# EAGLE board CTM_Status_Station_Design_v45 (EAGLE 9.7.0)
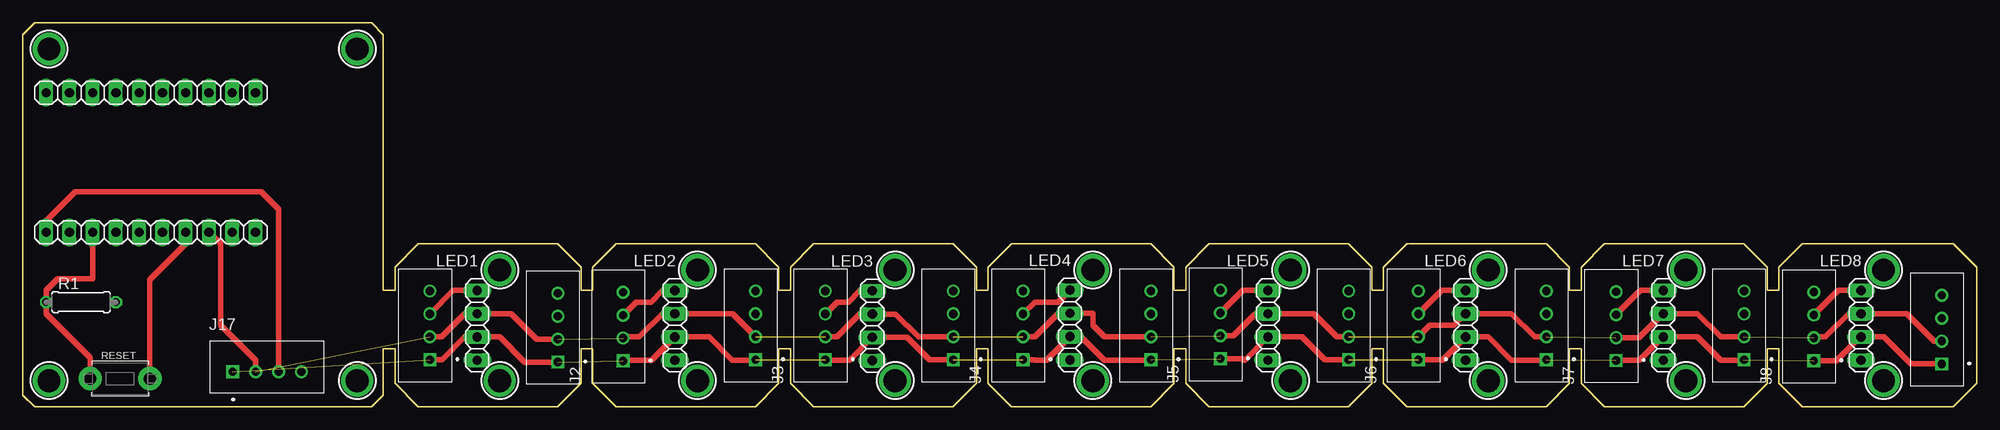
[diagram p0: board, top side]
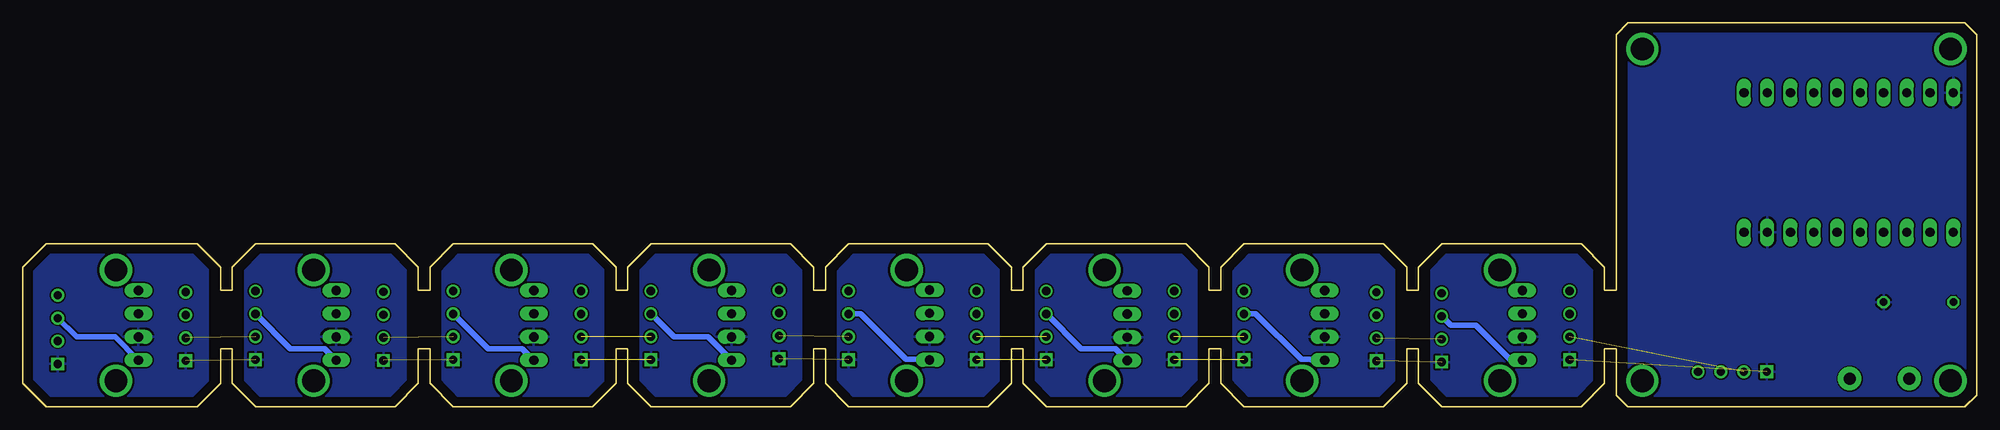
[diagram p1: board, bottom side, seen from below]

Size 213.36 x 41.91 mm. Coordinates in mm from the lower left corner, seen from the top.
Outline: 1.27,41.91 38.1,41.91 39.37,40.64 39.37,12.7 40.64,12.7 40.64,15.24 43.18,17.78 58.42,17.78 60.96,15.24 60.96,12.7 62.23,12.7 62.23,15.24 64.77,17.78 80.01,17.78 82.55,15.24 82.55,12.7 83.82,12.7 83.82,15.24 86.36,17.78 101.6,17.78 104.14,15.24 104.14,12.7 105.41,12.7 105.41,15.24 107.95,17.78 123.19,17.78 125.73,15.24 125.73,12.7 127,12.7 127,15.24 129.54,17.78 144.78,17.78 147.32,15.24 147.32,12.7 148.59,12.7 148.59,15.24 151.13,17.78 166.37,17.78 168.91,15.24 168.91,12.7 170.18,12.7 170.18,15.24 172.72,17.78 187.96,17.78 190.5,15.24 190.5,12.7 191.77,12.7 191.77,15.24 194.31,17.78 210.82,17.78 213.36,15.24 213.36,2.54 210.82,0 194.31,0 191.77,2.54 191.77,6.35 190.5,6.35 190.5,2.54 187.96,0 172.72,0 170.18,2.54 170.18,6.35 168.91,6.35 168.91,2.54 166.37,0 151.13,0 148.59,2.54 148.59,6.35 147.32,6.35 147.32,2.54 144.78,0 129.54,0 127,2.54 127,6.35 125.73,6.35 125.73,2.54 123.19,0 107.95,0 105.41,2.54 105.41,6.35 104.14,6.35 104.14,2.54 101.6,0 86.36,0 83.82,2.54 83.82,6.35 82.55,6.35 82.55,2.54 80.01,0 64.77,0 62.23,2.54 62.23,6.35 60.96,6.35 60.96,2.54 58.42,0 43.18,0 40.64,2.54 40.64,6.35 39.37,6.35 39.37,1.27 38.1,0 1.27,0 0,1.27 0,40.64 1.27,41.91
Copper layers (1*16): Top 0.035mm / dielectric 1.5mm / Bottom 0.035mm
Design rules "default": minimum track width 6mil, minimum drill 0.35mm, track to track 6mil, track to pad 6mil, pad to pad 6mil, via to via 6mil, smd to smd 6mil, copper to edge 40mil, drill to drill 6mil, minimum pad ring 10mil, minimum via ring 8mil, stop-mask expansion 4mil, vias tented up to drill 0mil, thermal gap 10mil

## Footprints (pad centres in the part's own frame; a part is rotated, then mirrored left to right if it is on the bottom)
B4B-XH-A(LF)(SN) = drill 0.9 square: 1 -3.75,0 | drill 0.9: 2 -1.25,0; 3 1.25,0; 4 3.75,0
1X04 = drill 1.016 long: 1 -3.81,0; 2 -1.27,0; 3 1.27,0; 4 3.81,0
0207/7 = drill 0.813 octagon: 1 -3.81,0; 2 3.81,0
TACT_PANA-EVQ = drill 1.3 pad 2.54: P$1 -3.25,0; P$2 3.25,0
1X10 = drill 1.016 long: 1 -11.43,0; 2 -8.89,0; 3 -6.35,0; 4 -3.81,0; 5 -1.27,0; 6 1.27,0; 7 3.81,0; 8 6.35,0; 9 8.89,0; 10 11.43,0
MOUNTINGHOLE_2.5_PLATED = drill 2.5 pad 3.2: P$1 0,0

## Placement (x,y rotation side)
J1  B4B-XH-A(LF)(SN)  [B4B-XH-A(LF)(SN)]  44.45,8.89 90 top
J2  B4B-XH-A(LF)(SN)  [B4B-XH-A(LF)(SN)]  65.56,8.75 90 top
J3  B4B-XH-A(LF)(SN)  [B4B-XH-A(LF)(SN)]  87.63,8.89 90 top
J4  B4B-XH-A(LF)(SN)  [B4B-XH-A(LF)(SN)]  109.22,8.89 90 top
J5  B4B-XH-A(LF)(SN)  [B4B-XH-A(LF)(SN)]  130.79,8.99 90 top
J6  B4B-XH-A(LF)(SN)  [B4B-XH-A(LF)(SN)]  152.4,8.89 90 top
J7  B4B-XH-A(LF)(SN)  [B4B-XH-A(LF)(SN)]  173.99,8.8 90 top
J8  B4B-XH-A(LF)(SN)  [B4B-XH-A(LF)(SN)]  195.58,8.77 90 top
J9  B4B-XH-A(LF)(SN)  [B4B-XH-A(LF)(SN)]  80.01,8.89 90 top
J10  B4B-XH-A(LF)(SN)  [B4B-XH-A(LF)(SN)]  58.42,8.63 90 top
J11  B4B-XH-A(LF)(SN)  [B4B-XH-A(LF)(SN)]  101.6,8.89 90 top
J12  B4B-XH-A(LF)(SN)  [B4B-XH-A(LF)(SN)]  123.19,8.89 90 top
J13  B4B-XH-A(LF)(SN)  [B4B-XH-A(LF)(SN)]  144.78,8.89 90 top
J14  B4B-XH-A(LF)(SN)  [B4B-XH-A(LF)(SN)]  166.37,8.89 90 top
J15  B4B-XH-A(LF)(SN)  [B4B-XH-A(LF)(SN)]  187.96,8.89 90 top
J16  B4B-XH-A(LF)(SN)  [B4B-XH-A(LF)(SN)]  209.55,8.42 90 top
J17  B4B-XH-A(LF)(SN)  [B4B-XH-A(LF)(SN)]  26.67,3.81 0 top
LED1  PINHD-1X4  [1X04]  49.61,8.89 270 top
LED2  PINHD-1X4  [1X04]  71.2,8.89 270 top
LED3  PINHD-1X4  [1X04]  92.75,8.85 270 top
LED4  PINHD-1X4  [1X04]  114.34,8.93 270 top
LED5  PINHD-1X4  [1X04]  135.97,8.89 270 top
LED6  PINHD-1X4  [1X04]  157.56,8.89 270 top
LED7  PINHD-1X4  [1X04]  179.15,8.89 270 top
LED8  PINHD-1X4  [1X04]  200.74,8.89 270 top
R1  10k  [0207/7]  6.35,11.43 0 top
RESET  [TACT_PANA-EVQ]  10.62,3.07 180 top
TP_LEFT_H  PINHD-1X10  [1X10]  13.97,19.05 0 top
TP_RIGHT_H  PINHD-1X10  [1X10]  13.97,34.29 0 top
U$1  MOUNTINGHOLE2.5  [MOUNTINGHOLE_2.5_PLATED]  2.85,39.06 0 top
U$2  MOUNTINGHOLE2.5  [MOUNTINGHOLE_2.5_PLATED]  52.07,14.93 0 top
U$3  MOUNTINGHOLE2.5  [MOUNTINGHOLE_2.5_PLATED]  52.07,2.85 0 top
U$4  MOUNTINGHOLE2.5  [MOUNTINGHOLE_2.5_PLATED]  73.66,14.93 0 top
U$5  MOUNTINGHOLE2.5  [MOUNTINGHOLE_2.5_PLATED]  73.66,2.85 0 top
U$6  MOUNTINGHOLE2.5  [MOUNTINGHOLE_2.5_PLATED]  95.25,14.93 0 top
U$7  MOUNTINGHOLE2.5  [MOUNTINGHOLE_2.5_PLATED]  36.52,39.06 0 top
U$8  MOUNTINGHOLE2.5  [MOUNTINGHOLE_2.5_PLATED]  36.52,2.85 0 top
U$9  MOUNTINGHOLE2.5  [MOUNTINGHOLE_2.5_PLATED]  95.25,2.85 0 top
U$10  MOUNTINGHOLE2.5  [MOUNTINGHOLE_2.5_PLATED]  116.84,14.93 0 top
U$11  MOUNTINGHOLE2.5  [MOUNTINGHOLE_2.5_PLATED]  116.84,2.85 0 top
U$12  MOUNTINGHOLE2.5  [MOUNTINGHOLE_2.5_PLATED]  138.43,14.93 0 top
U$13  MOUNTINGHOLE2.5  [MOUNTINGHOLE_2.5_PLATED]  138.43,2.85 0 top
U$14  MOUNTINGHOLE2.5  [MOUNTINGHOLE_2.5_PLATED]  160.02,14.93 0 top
U$15  MOUNTINGHOLE2.5  [MOUNTINGHOLE_2.5_PLATED]  181.61,14.93 0 top
U$16  MOUNTINGHOLE2.5  [MOUNTINGHOLE_2.5_PLATED]  181.61,2.85 0 top
U$17  MOUNTINGHOLE2.5  [MOUNTINGHOLE_2.5_PLATED]  203.2,14.93 0 top
U$18  MOUNTINGHOLE2.5  [MOUNTINGHOLE_2.5_PLATED]  203.2,2.85 0 top
U$19  MOUNTINGHOLE2.5  [MOUNTINGHOLE_2.5_PLATED]  160.02,2.85 0 top
U$28  MOUNTINGHOLE2.5  [MOUNTINGHOLE_2.5_PLATED]  2.85,2.85 0 top

## Library data of the parts
J1-J17 = Headers; CREATED_BY: PCBLayout.com; DIGIKEY_PARTNO: 455-2249-ND; MANUFACTURER: JST Sales America Inc.; MPN: B4B-XH-A(LF)(SN)
LED1-LED8 = Connector; CATEGORY: CONNECTOR; SUB-CATEGORY: PIN-HEADER
R1 RESET = adafruit
TP_LEFT_H = Connector; 14: 14; 15: 15; 25: 25; 26: 26; 27: 27; 3V3: 3v3; 4: 4; 5V: 5v; BAT: BAT; CATEGORY: CONNECTOR; GND: GND; SUB-CATEGORY: PIN-HEADER
TP_RIGHT_H = Connector; 18: 18; 19: 19; 21: 21; 22: 22; 23: 23; 32: 32; 33: 33; 5: 5; CATEGORY: CONNECTOR; GND: GND; RST: RST; SUB-CATEGORY: PIN-HEADER
U$1-U$19 U$28 = microbuilder; BOM: EXCLUDE; REV: A

## Nets
3V3: RESET.P$1 TP_LEFT_H.7
DIN1: J1.3 LED1.1
DIN2: J2.3 LED2.1
DIN3: J3.3 LED3.1
DIN4: J4.3 LED4.1
DIN5: J5.3 LED5.1
DIN6: J6.3 LED6.1
DIN7: J7.3 LED7.1
DIN8: J8.3 LED8.1
DOUT: J17.3 TP_LEFT_H.1
DOUT1: J10.3 LED1.4
DOUT2: J9.3 LED2.4
DOUT3: J11.3 LED3.4
DOUT4: J12.3 LED4.4
DOUT5: J13.3 LED5.4
DOUT6: J14.3 LED6.4
DOUT7: J15.3 LED7.4
DOUT8: J16.3 LED8.4
GND: J1.1 J2.1 J3.1 J4.1 J5.1 J6.1 J7.1 J8.1 J9.1 J10.1 J11.1 J12.1 J13.1 J14.1 J15.1 J16.1 J17.1 LED1.3 LED2.3 LED3.3 LED4.3 LED5.3 LED6.3 LED7.3 LED8.3 R1.2 TP_LEFT_H.9 TP_RIGHT_H.1
RESET: R1.1 RESET.P$2 TP_LEFT_H.3
VCC: J1.2 J2.2 J3.2 J4.2 J5.2 J6.2 J7.2 J8.2 J9.2 J10.2 J11.2 J12.2 J13.2 J14.2 J15.2 J16.2 J17.2 LED1.2 LED2.2 LED3.2 LED4.2 LED5.2 LED6.2 LED7.2 LED8.2 TP_LEFT_H.8

## Tracks (layer width: path | path; a pad name or v marks a point on that pad's centre or on a via)
3V3
  Top 0.61: RESET.P$1 13.87,13.87 17.78,17.78 TP_LEFT_H.7
DIN1
  Top 0.61: J1.3 47.01,12.7 LED1.1
DIN2
  Top 0.61: J2.3 66.98,11.43 68.58,11.43 69.85,12.7 LED2.1
DIN3
  Top 0.61: J3.3 88.92,11.43 90.17,11.43 91.44,12.7 92.71,12.7 LED3.1
DIN4
  Top 0.61: J4.3 110.51,11.43 113.03,11.43 LED4.1
DIN5
  Top 0.61: J5.3 133.25,12.7 LED5.1
DIN6
  Top 0.61: J6.3 154.96,12.7 LED6.1
DIN7
  Top 0.61: J7.3 176.64,12.7 LED7.1
DIN8
  Top 0.61: J8.3 198.26,12.7 LED8.1
DOUT
  Top 0.61: J17.3 27.92,21.57 27.94,21.59 26.03,23.5 5.71,23.5 2.54,20.32 TP_LEFT_H.1
DOUT1
  Bottom 0.61: LED1.4 50.88,5.08 54.69,8.89 57.42,8.89 J10.3
DOUT2
  Bottom 0.61: LED2.4 72.61,5.08 72.7,5.17 73.75,5.17 78.74,10.16 79.99,10.16 J9.3
DOUT3
  Bottom 0.61: LED3.4 94.06,6.35 97.81,6.35 J11.3
DOUT4
  Bottom 0.61: J12.3 121.9,10.14 116.93,5.17 114.39,5.17 LED4.4
DOUT5
  Bottom 0.61: LED5.4 138.51,7.62 142.26,7.62 J13.3
DOUT6
  Bottom 0.61: LED6.4 158.83,6.35 162.58,6.35 J14.3
DOUT7
  Bottom 0.61: LED7.4 180.42,6.35 184.17,6.35 J15.3
DOUT8
  Bottom 0.61: LED8.4 203.28,7.62 207.5,7.62 J16.3
GND  (8 unrouted)
  Top 0.61: J1.1 45.78,5.14 48.26,7.62 LED1.3 52.07,7.62 54.81,4.88 J10.1 | J9.1 79.95,5.08 77.47,5.08 74.93,7.62 LED2.3 68.66,5.08 65.63,5.08 J2.1 | J11.1 99,5.14 96.56,7.58 LED3.3 90.25,5.08 87.69,5.08 J3.1 | J12.1 123.13,5.08 118.11,5.08 115.53,7.66 LED4.3 111.76,5.08 110.49,5.08 110.43,5.14 J4.1 | J5.1 133.19,5.24 133.35,5.08 133.43,5.08 LED5.3 139.7,7.62 142.18,5.14 J13.1 | J6.1 154.88,5.14 154.94,5.08 155.02,5.08 LED6.3 160.02,7.62 162.56,5.08 166.31,5.08 J14.1 | J7.1 176.5,5.05 179.07,7.62 LED7.3 182.88,7.62 185.42,5.08 187.9,5.08 J15.1 | J8.1 198.06,5.02 200.66,7.62 LED8.3 203.2,7.62 206.15,4.67 J16.1
  pour Bottom: 0.08,0.08 38.02,0.08 38.02,41.83 0.08,41.83
  pour Bottom: 41.99,0.08 59.61,0.08 59.61,17.7 41.99,17.7
  pour Bottom: 63.58,0.08 81.2,0.08 81.2,17.7 63.58,17.7
  pour Bottom: 85.17,0.08 102.79,0.08 102.79,17.7 85.17,17.7
  pour Bottom: 106.76,0.08 124.38,0.08 124.38,17.7 106.76,17.7
  pour Bottom: 128.35,0.08 145.97,0.08 145.97,17.7 128.35,17.7
  pour Bottom: 149.94,0.08 167.56,0.08 167.56,17.7 149.94,17.7
  pour Bottom: 171.53,0.08 189.15,0.08 189.15,17.7 171.53,17.7
  pour Bottom: 193.12,0.08 213.28,0.08 213.28,17.7 193.12,17.7
RESET
  Top 0.61: TP_LEFT_H.3 7.62,13.97 3.81,13.97 2.54,12.7 R1.1 2.54,10.16 7.37,5.33 RESET.P$2
VCC  (8 unrouted)
  Top 0.61: TP_LEFT_H.8 21.59,17.78 21.59,8.89 25.42,5.06 J17.2 | J1.2 44.47,7.62 45.72,7.62 48.26,10.16 LED1.2 53.34,10.16 56.12,7.38 J10.2 | J2.2 65.67,7.62 67.31,7.62 69.85,10.16 LED2.2 77.49,10.16 J9.2 | J3.2 88.92,7.64 91.44,10.16 92.71,10.16 LED3.2 95.29,10.12 97.79,7.62 101.58,7.62 J11.2 | J12.2 123.17,7.62 118.11,7.62 116.84,8.89 116.84,10.16 116.8,10.2 LED4.2 113.07,10.2 110.51,7.64 J4.2 | J5.2 132.2,7.74 134.62,10.16 LED5.2 140.97,10.16 143.49,7.64 J13.2 | J6.2 153.65,8.89 156.29,8.89 LED6.2 162.56,10.16 165.1,7.62 166.35,7.62 J14.2 | J7.2 176.46,7.55 179.07,10.16 LED7.2 182.88,10.16 185.4,7.64 J15.2 | J8.2 195.68,7.62 196.85,7.62 199.39,10.16 LED8.2 205.74,10.16 208.73,7.17 J16.2